# Altium PCB PCB1.PcbDoc
Units mm, origin at the board's own origin, x right, y up, seen from the top; angles counter-clockwise.
Board outline 100.42 x 70.25 mm, 2 copper layers (Top Layer, Bottom Layer); 28 components, 68 nets, 182 pads, 14 vias.
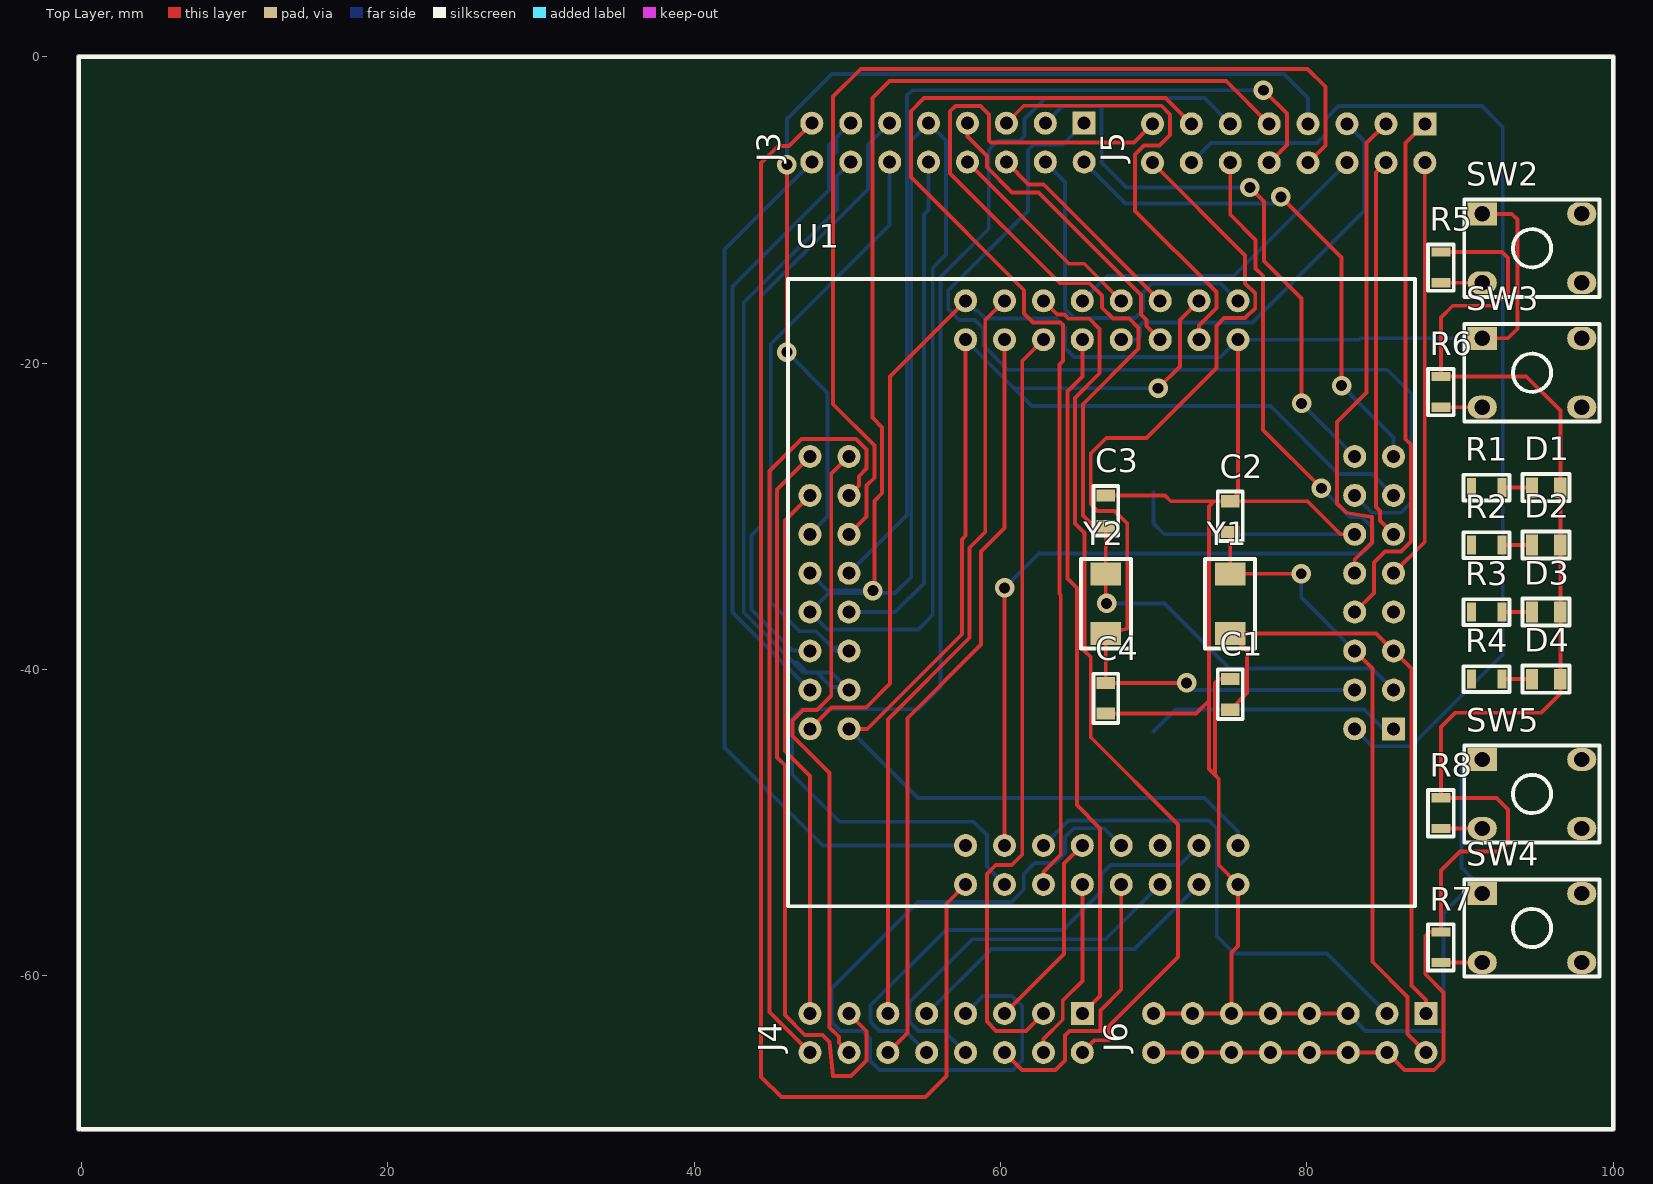
[diagram p0: Top Layer view]
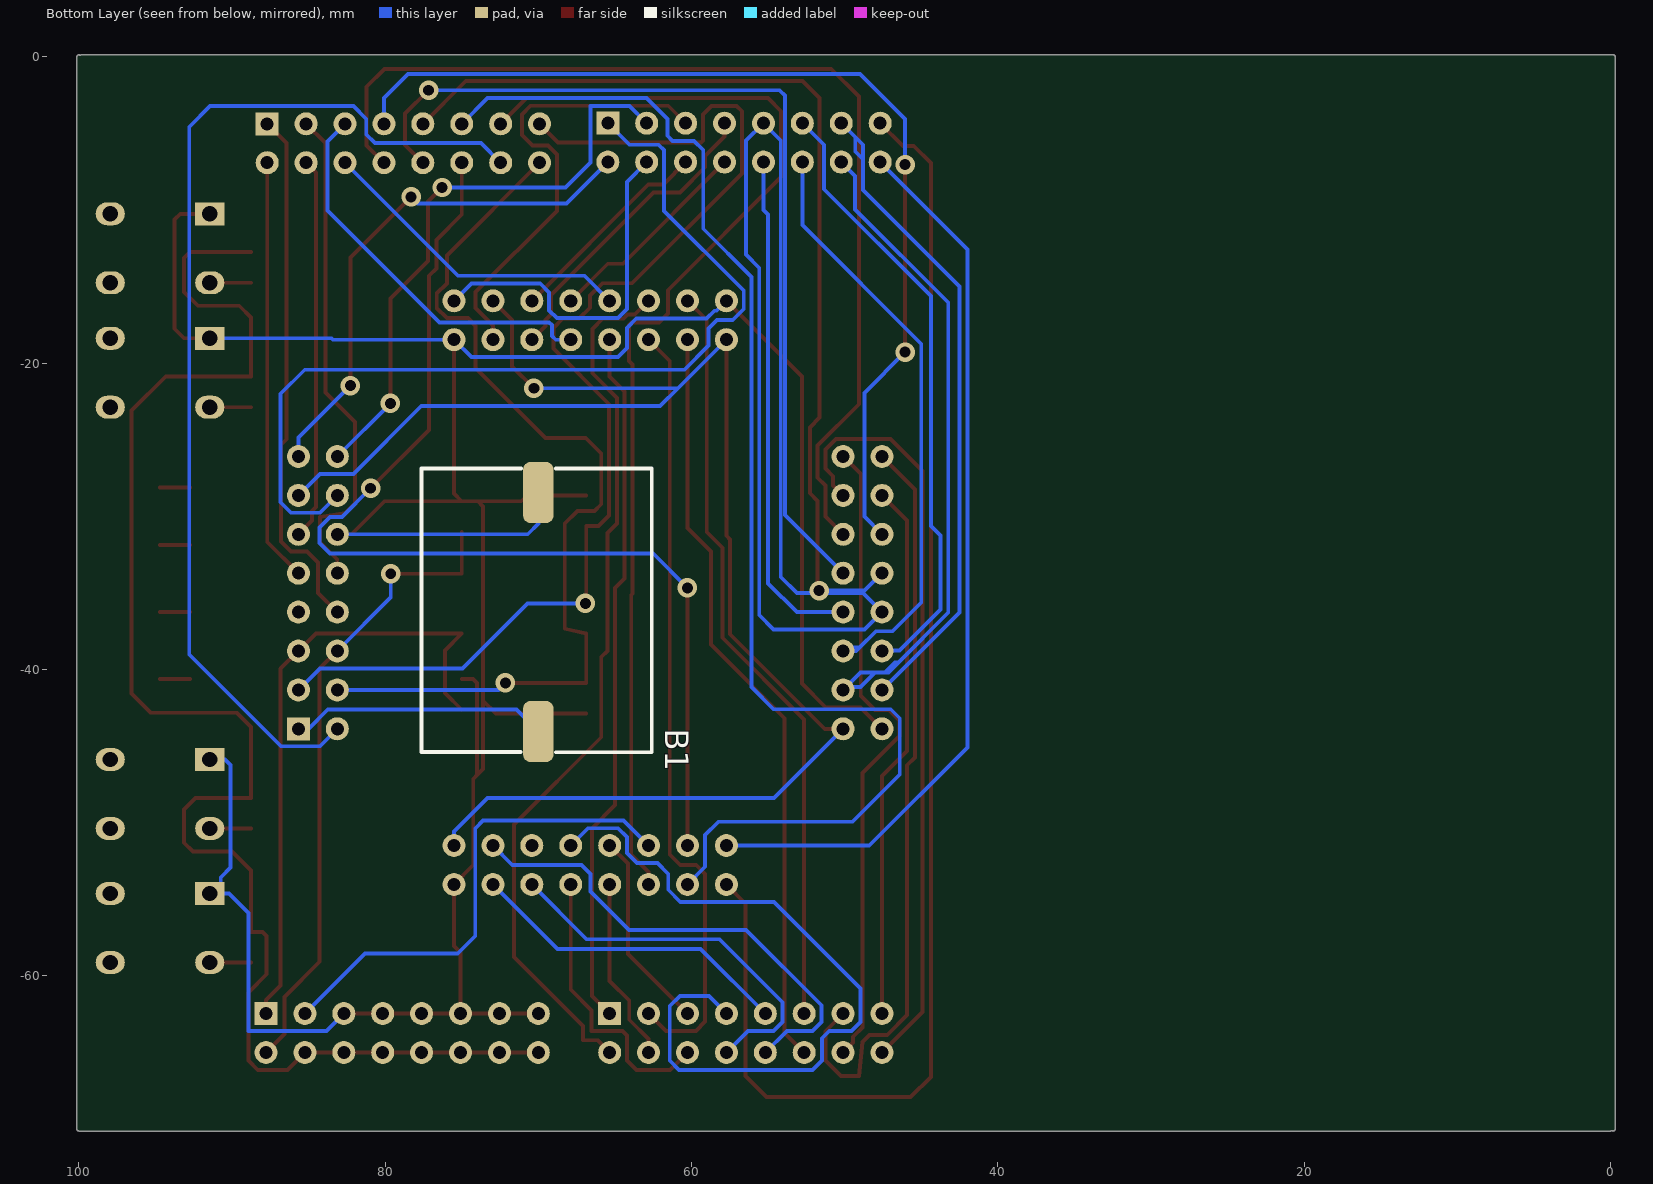
[diagram p1: Bottom Layer view, seen from below]

## Layer stack, top to bottom
Top Solder: solder mask 0.0102, Solder Resist, Dk 3.5
Top Layer: signal copper 0.0356
Dielectric 1: dielectric 0.32, FR-4, Dk 4.8
Bottom Layer: signal copper 0.0356
Bottom Solder: solder mask 0.0102, Solder Resist, Dk 3.5

## Board outline
-0.296,-70 ccw(c-0.169,-70) -0.084,-70.095 ccw(c0,-70) 0,-70.127 100,-70.127 ccw(c100,-70) 100.127,-70 100.127,-69.999 100.127,0 ccw(c100,0) 99.916,0.095 ccw(c99.831,0) 99.831,0.127 -0.169,0.127 ccw(c-0.169,0) -0.296,0

## Design rules (kind name [scope] priority, off if disabled: settings)
Clearance [All] p1: gap=0.254 ignorepadtopadclearanceinfootprint=FALSE except(0: Arc-Hole Track-Hole SMDPad-Hole THPad-Hole Via-Hole Fill-Hole Poly-Hole Region-Hole Text-Hole)
PolygonConnect [All] p1: connectstyle=Relief reliefconductorwidth=0.254 reliefentries=4 polygonreliefangle="90 Angle" airgapwidth=0.254
RoutingVias [All] p1: holewidth=0.711 width=1.27 viastyle="Through Hole" minholewidth=0.711 minwidth=1.27 maxholewidth=0.711 maxwidth=1.27
SolderMaskExpansion [All] p1: expansion=0.102
Width [All] p1: maxlimit=1 minlimit=0.254 preferedwidth=0.254
30 further rules are at their usual default settings.

## Components (designator, comment, footprint, x,y, rotation, side; value= is the part's Value field where it differs from the comment)
B1 "Batery" CR1220 70,-36.25 r180 bottom
C1 "22pF" C0805 75,-41.625 r90 top
C2 "22pF" C0805 75,-30.015 r90 top
C3 "22pF" C0805 66.875,-29.64 r90 top
C4 "22pF" C0805 66.875,-41.875 r270 top
D1 "LED0805" L0805RED 95.625,-28.125 r270 top
D2 "LED0805" L0805RED 95.625,-31.875 r270 top
D3 "LED0805" L0805RED 95.625,-36.25 r270 top
D4 "LED0805" L0805RED 95.625,-40.625 r270 top
J3 "Header 8x2 TH Pitch 2.54mm" "Header 8x2 TH Pitch 2.54mm" 56.575,-5.605 r270 top
J4 "Header 8x2 TH Pitch 2.54mm" "Header 8x2 TH Pitch 2.54mm" 56.455,-63.73 r270 top
J5 "Header 8x2 TH Pitch 2.54mm" "Header 8x2 TH Pitch 2.54mm" 78.81,-5.645 r270 top
J6 "Header 8x2 TH Pitch 2.54mm" "Header 8x2 TH Pitch 2.54mm" 78.89,-63.73 r270 top
R1 "10k" R0805 91.795,-26.601 r0 top
R2 "10k" R0805 91.795,-30.351 r0 top
R3 "10k" R0805 91.795,-34.726 r0 top
R4 "10k" R0805 91.795,-39.101 r0 top
R5 "10k" R0805 87.226,-13.7 r90 top
R6 "10k" R0805 87.226,-21.825 r90 top
R7 "10k" R0805 87.226,-58.075 r90 top
R8 "10k" R0805 87.226,-49.325 r90 top
SW2 "Button1" BUTTON_HOLE_5.0mm 94.7,-12.5 r90 top
SW3 "Button1" BUTTON_HOLE_5.0mm 94.7,-20.625 r90 top
SW4 "Button1" BUTTON_HOLE_5.0mm 94.7,-56.875 r90 top
SW5 "Button1" BUTTON_HOLE_5.0mm 94.7,-48.125 r90 top
U1 "STM32F103RCT6" "QFP64_0.5 SOCKET PINOUT" 66.615,-34.98 r0 top
Y1 "8MHz" SMD5032 75,-37.65 r270 top
Y2 "8MHz" SMD5032 66.875,-33.75 r90 top

## Footprints (in the part's own frame and the unit in brackets; to place one, negate y for a bottom-side part, rotate by r counter-clockwise, add the part's x,y. Pads: shape width x height; smd on the part's side, far side on the other; paste and mask are expansions set on the pad)
BUTTON_HOLE_5.0mm [mm]
  rect 1.5x1.9 hole 1: 1(2.25,3.25)
  oval 1.5x1.9 hole 1: 2(2.25,-3.25) 3(-2.25,3.25) 4(-2.25,-3.25)
  silkscreen extent -3.17,-4.4 3.18,4.43, body extent -3,-3.86 3,3.86, height 5
C0805 [mm]
  rect 0.8x1.2 smd: 1(-1,0) 2(1,0)
  silkscreen extent -1.6,-0.81 1.63,0.81, body extent -1,-0.62 1,0.63, height 0.58
CR1220 [mm]
  rrect50% 2x4 smd: 1(0,-7.8) 2(0,7.8)
  silkscreen extent -7.62,-9.15 7.4,9.37, body extent -7.62,-9.1 7.37,9.4, height 4.04
"Header 8x2 TH Pitch 2.54mm" [mm]
  rect 1.5x1.5 hole 0.85: 1(-1.27,8.89)
  round 1.5 hole 0.85: 2(1.27,8.89) 3(-1.27,6.35) 4(1.27,6.35) 5(-1.27,3.81) 6(1.27,3.81) 7(-1.27,1.27) 8(1.27,1.27) 9(-1.27,-1.27) 10(1.27,-1.27) 11(-1.27,-3.81) 12(1.27,-3.81) 13(-1.27,-6.35) 14(1.27,-6.35) 15(-1.27,-8.89) 16(1.27,-8.89)
  body extent -2.54,-10.16 2.54,10.16, height 8.89
L0805RED [mm]
  rect 1.35x0.8 smd: 1(0,0.925) 2(0,-0.925)
  silkscreen extent -0.89,-1.55 0.89,1.52, body extent -0.67,-1.05 0.68,1.05, height 0.9
"QFP64_0.5 SOCKET PINOUT" [mm]
  rect 1.5x1.5 hole 0.85: 1(19.05,-8.89)
  round 1.5 hole 0.85: 2(16.51,-8.89) 3(19.05,-6.35) 4(16.51,-6.35) 5(19.05,-3.81) 6(16.51,-3.81) 7(19.05,-1.27) 8(16.51,-1.27) 9(19.05,1.27) 10(16.51,1.27) 11(19.05,3.81) 12(16.51,3.81) 13(19.05,6.35) 14(16.51,6.35) 15(19.05,8.89) 16(16.51,8.89) 17(8.89,19.05) 18(8.89,16.51) 19(6.35,19.05) 20(6.35,16.51) 21(3.81,19.05) 22(3.81,16.51) 23(1.27,19.05) 24(1.27,16.51) 25(-1.27,19.05) 26(-1.27,16.51) 27(-3.81,19.05) 28(-3.81,16.51) 29(-6.35,19.05) 30(-6.35,16.51) 31(-8.89,19.05) 32(-8.89,16.51) 33(-19.05,8.89) 34(-16.51,8.89) 35(-19.05,6.35) 36(-16.51,6.35) 37(-19.05,3.81) 38(-16.51,3.81) 39(-19.05,1.27) 40(-16.51,1.27) 41(-19.05,-1.27) 42(-16.51,-1.27) 43(-19.05,-3.81) 44(-16.51,-3.81) 45(-19.05,-6.35) 46(-16.51,-6.35) 47(-19.05,-8.89) 48(-16.51,-8.89) 49(-8.89,-19.05) 50(-8.89,-16.51) 51(-6.35,-19.05) 52(-6.35,-16.51) 53(-3.81,-19.05) 54(-3.81,-16.51) 55(-1.27,-19.05) 56(-1.27,-16.51) 57(1.27,-19.05) 58(1.27,-16.51) 59(3.81,-19.05) 60(3.81,-16.51) 61(6.35,-19.05) 62(6.35,-16.51) 63(8.89,-19.05) 64(8.89,-16.51)
  silkscreen extent -20.48,-20.48 20.45,20.48, body extent -20.32,-20.32 20.32,20.32, height 9.5
R0805 [mm]
  rect 0.6x1.24 smd: 1(-1.05,-1.524) 2(0.95,-1.524)
  silkscreen extent -1.57,-2.36 1.45,-0.69, body extent -1.05,-2.15 0.95,-0.9, height 0.45
SMD5032 [mm]
  rect 1.5x2 smd: 1(-3.9,0) 2(0,0)
  silkscreen extent -4.87,-1.65 0.97,1.62, body extent -4.45,-1.6 0.55,1.6, height 1.2

## Part data
C1 C2 C3 C4: library part Capacitors(SMD)
R1 R2 R3 R4 R5 R6 R7 R8: library part "Resistor SMD"
U1: "LQFP64"
Y1 Y2: library part Crystal

## Via types
v1: diameter 1.27, hole 0.711, Top Layer to Bottom Layer, 14 vias

## Nets (pads, with @x,y where several pads share a name; then routed paths per layer and width w, separated by ;. In a path a pad name is that pad's centre, name@x,y a point inside that pad or via, vN(x,y) a via of type N, cw(c..) or ccw(c..) an arc to the next point about the centre after c; other vN are vias at no path point)
3.3V: U1.13 U1.19 U1.32 U1.48 U1.64 | length 106.7
  Top Layer w0.254: U1.48 51.306,-43.87 57.477,-37.698 57.477,-31.515 57.725,-31.267 U1.32 ; v1(70.285,-21.639) 71.708,-20.216 71.708,-17.187 U1.19
  Bottom Layer w0.254: U1.48 54.62,-48.385 73.309,-48.385 75.505,-50.581 U1.64 ; U1.32 60.894,-21.639 ; v1(70.285,-21.639) 60.894,-21.639 ; U1.13 84.262,-27.227 82.061,-27.227 77.642,-22.807 62.062,-22.807 60.894,-21.639
GND: B1.2 C1.2 C2.2 C3.2 C4.2 J6.5 J6.7 J6.9 J6.11 J6.13 J6.15 SW2.1 SW3.1 SW4.1 SW5.1 U1.12 U1.18 U1.31 U1.47 U1.63 | length 214.7
  Top Layer w0.254: U1.47 48.968,-42.467 51.235,-42.467 52.785,-40.917 52.785,-20.87 U1.31 ; C4.2 72.773,-42.875 73.613,-42.035 ; C3.2 70.743,-28.64 71.118,-29.015 73.943,-29.015 ; J6.15 J6.13 J6.11 ; C1.2 74.261,-40.625 73.994,-40.892 73.994,-46.886 ; U1.18 75.505,-28.51 C2.2 ; J6.5 J6.7 J6.9 J6.11 ; U1.12 82.188,-31.17 80.033,-29.015 C2.2 ; SW3.1 93.125,-18.375 93.75,-17.75 93.75,-10.625 93.375,-10.25 SW2.1 ; 73.613,-42.035 73.613,-46.505 73.994,-46.886 ; 73.613,-42.035 73.613,-29.345 73.943,-29.015 ; 73.943,-29.015 C2.2 ; 73.994,-46.886 74.248,-47.14 74.248,-52.773 U1.63 75.505,-58.044 75.08,-58.469 J6.11
  Bottom Layer w0.254: U1.31 58.376,-16.581 58.503,-16.581 59.017,-17.095 63.608,-17.095 64.214,-17.702 64.214,-19.016 64.799,-19.601 74.374,-19.601 U1.18 83.417,-18.47 83.512,-18.375 SW3.1 ; B1.2 70,-30.478 70.692,-31.17 U1.12 ; J6.5 83.84,-63.6 88.929,-63.6 88.929,-55.895 90.199,-54.625 SW4.1@90.732,-54.625 ; SW4.1 SW4.1@90.732,-54.625 ; SW5.1 90.448,-45.875 90.097,-46.226 90.097,-52.932 90.732,-53.567 SW4.1@90.732,-54.625
NetB1_1: B1.1 U1.1 | length 16.8
  Bottom Layer w0.254: B1.1 71.431,-42.619 83.747,-42.619 84.998,-43.87 U1.1
NetD1_2: D1.2 R1.2 | length 2
  Top Layer w0.254: R1.2 D1.2
NetD2_2: D2.2 R2.2 | length 2
  Top Layer w0.254: R2.2 D2.2
NetD3_2: D3.2 R3.2 | length 2
  Top Layer w0.254: R3.2 D3.2
NetD4_2: D4.2 R4.2 | length 2
  Top Layer w0.254: R4.2 D4.2
NetJ1_1: R4.1
NetJ1_3: R3.1
NetJ1_5: R2.1
NetJ1_7: R1.1
NetR5_1: R5.1 SW2.3 | length 2.7
  Top Layer w0.254: R5.1 SW2.3
NetR6_1: R6.1 SW3.3 | length 2.7
  Top Layer w0.254: R6.1 SW3.3
NetR7_1: R7.1 SW4.3 | length 2.7
  Top Layer w0.254: R7.1 SW4.3
NetR8_1: R8.1 SW5.3 | length 2.7
  Top Layer w0.254: R8.1 SW5.3
NRST: U1.7
PA0: J3.1 U1.14 | length 61.6
  Bottom Layer w0.254: J3.1 64.061,-5.738 62.15,-5.738 61.794,-6.094 61.794,-10.064 56.594,-15.264 56.594,-16.476 57.312,-17.194 58.347,-17.194 58.881,-17.727 58.881,-18.845 60.463,-20.427 85.253,-20.427 86.821,-21.994 86.821,-29.081 86.135,-29.767 84.262,-29.767 U1.14
PA1: J3.2 U1.15 | length 34.1
  Top Layer w0.254: v1(78.312,-9.142) 82.274,-13.104 v1(82.274,-21.461)
  Bottom Layer w0.254: J3.2 68.16,-9.57 77.884,-9.57 v1(78.312,-9.142) ; v1(82.274,-21.461) 85.665,-24.852 U1.15
PA2: J3.3 U1.16 | length 38.6
  Top Layer w0.254: v1(76.28,-8.532) 77.194,-9.447 77.194,-13.325 79.658,-15.789 v1(79.658,-22.623)
  Bottom Layer w0.254: J3.3 64.056,-3.204 66.596,-3.204 66.596,-6.907 68.222,-8.532 v1(76.28,-8.532) ; v1(79.658,-22.623) U1.16
PA3: J3.4 U1.17 | length 23.8
  Bottom Layer w0.254: J3.4 64.214,-8.164 64.214,-16.476 64.799,-17.061 68.786,-17.061 69.294,-16.553 69.294,-15.384 69.879,-14.799 74.374,-14.799 U1.17
PA4: J3.5 U1.20 | length 30.3
  Top Layer w0.254: J3.5 61.522,-3.198 70.514,-3.198 71.073,-3.757 71.073,-5.098 70.387,-5.784 69.371,-5.784 68.787,-6.368 68.787,-10.056 74.096,-15.366 74.096,-16.4 72.965,-17.531 U1.20
PA5: J3.6 U1.21 | length 13.8
  Top Layer w0.254: J3.6 61.84,-8.33 62.825,-8.33 U1.21
PA6: J3.7 U1.22 | length 20.4
  Top Layer w0.254: J3.7 57.845,-5.212 59.109,-6.476 59.109,-7.212 60.76,-8.863 62.486,-8.863 69.17,-15.547 69.17,-16.831 69.524,-17.185 69.524,-17.569 U1.22
PA7: J3.8 U1.23 | length 13.8
  Top Layer w0.254: J3.8 64.481,-13.511 65.466,-13.511 U1.23
PA8: J3.9 U1.41 | length 79.5
  Bottom Layer w0.254: U1.41 48.702,-37.387 54.639,-37.387 55.578,-36.448 55.578,-13.783 56.442,-12.919 56.442,-5.472 J3.9 54.174,-5.466 54.174,-33.951 53.125,-35 48.815,-35 U1.41
PA9: J3.10 U1.42 | length 33.7
  Bottom Layer w0.254: U1.42 53.125,-36.25 55,-34.375 55,-10.305 ; J3.10 55.305,-10 ; 55,-10.305 55.305,-10 ; 55,-10.305 55.305,-10
PA10: J3.11 U1.43 | length 40.4
  Bottom Layer w0.254: U1.43 47.537,-38.762 46.434,-38.762 43.75,-36.078 43.75,-31.25 44.375,-30.625 44.375,-15.625 51.356,-8.644 51.356,-5.744 J3.11
PA11: J3.12 U1.44 | length 39.6
  Bottom Layer w0.254: J3.12 52.765,-10.985 45,-18.75 45,-35.625 46.875,-37.5 47.97,-37.5 49.022,-38.551 ; 49.022,-38.551 49.26,-38.79 U1.44 49.867,-38.551 49.022,-38.551
PA12: J3.13 U1.45 | length 43.9
  Bottom Layer w0.254: U1.45 42.5,-36.265 42.5,-15 48.816,-8.684 48.816,-6.685 ; J3.13 49.313,-5.247 ; 48.816,-6.685 48.816,-5.744 49.313,-5.247 ; 48.816,-6.685 49.313,-6.188 49.313,-5.247
PA13: J3.14 U1.46 | length 44.7
  Bottom Layer w0.254: U1.46 U1.46@49.915,-41.139 ; J3.14 49.324,-7.776 49.324,-9.957 43.242,-16.04 43.242,-36.288 46.491,-39.537 ; 46.491,-39.537 47.153,-40.199 47.375,-40.199 ; 46.491,-39.537 46.713,-39.537 47.375,-40.199 ; 47.375,-40.199 48.034,-40.199 ; 48.034,-40.199 48.974,-40.199 U1.46@49.915,-41.139 ; 48.034,-40.199 48.974,-41.139 U1.46@49.915,-41.139
PA14: J3.15 U1.49 | length 90.3
  Top Layer w0.254: J3.15 46.193,-5.827 45.495,-5.827 44.377,-6.944 44.377,-66.597 45.698,-67.918 55.096,-67.918 56.468,-66.546 56.468,-55.287 U1.49
PA15: J3.16 U1.50 | length 59
  Bottom Layer w0.254: J3.16 41.99,-12.57 41.99,-45.083 48.397,-51.49 U1.50
PB0: J4.1 U1.26 | length 45.8
  Top Layer w0.254: J4.1 66.501,-61.304 66.501,-50.366 64.986,-48.851 64.986,-34.678 64.367,-34.059 64.367,-21.861 65.345,-20.883 U1.26
PB1: J4.2 U1.27 | length 58.2
  Top Layer w0.254: U1.27 63.706,-16.831 64.173,-16.831 64.444,-17.103 65.801,-17.103 66.476,-17.778 66.476,-20.66 64.875,-22.261 64.875,-30.478 65.494,-31.097 65.494,-38.784 65.891,-39.181 65.891,-44.423 71.581,-50.112 71.581,-58.764 67.083,-63.261 67.083,-64.198 66.147,-64.198 J4.2
PB2: J4.3 U1.28 | length 51.1
  Top Layer w0.254: J4.3 61.665,-63.6 59.719,-63.6 59.109,-62.99 59.109,-53.338 59.694,-52.754 60.735,-52.754 61.421,-52.068 61.421,-19.854 U1.28
PB3: J4.4 U1.55 | length 12
  Top Layer w0.254: J4.4 62.805,-64.123 64.062,-62.865 64.062,-61.618 65.345,-60.336 U1.55
PB4: J4.5 U1.56 | length 13.1
  Top Layer w0.254: J4.5 64.16,-58.565 64.16,-52.675 U1.56
PB5: J4.6 U1.57 | length 18.9
  Top Layer w0.254: J4.6 61.405,-66.14 63.604,-66.14 64.214,-65.53 64.214,-63.879 64.493,-63.6 66.526,-63.6 66.526,-62.253 67.885,-60.895 U1.57
PB6: J4.7 U1.58 | length 50
  Bottom Layer w0.254: J4.7 58.871,-61.314 60.76,-61.314 61.421,-61.974 61.421,-65.53 60.811,-66.14 52.099,-66.14 51.489,-65.53 51.489,-64.074 51.006,-63.591 49.559,-63.591 48.974,-63.006 48.974,-60.821 54.628,-55.167 60.735,-55.167 61.522,-54.379 61.522,-53.338 62.234,-52.627 63.554,-52.627 64.214,-51.967 64.214,-50.944 64.799,-50.359 66.754,-50.359 U1.58
PB7: J4.8 U1.59 | length 25.3
  Bottom Layer w0.254: J4.8 56.316,-63.591 54.639,-63.591 54.054,-63.006 54.054,-61.721 58.17,-57.605 66.85,-57.605 U1.59
PB8: J4.9 U1.61 | length 21.3
  Bottom Layer w0.254: J4.9 59.405,-58.24 68.755,-58.24 U1.61
PB9: J4.10 U1.62 | length 32
  Bottom Layer w0.254: J4.10 53.776,-63.591 52.099,-63.591 51.514,-63.006 51.514,-61.914 56.432,-56.996 64.088,-56.996 66.602,-54.481 66.602,-53.338 67.187,-52.754 71.701,-52.754 U1.62
PB10: J4.11 U1.29 | length 49.7
  Top Layer w0.254: J4.11 52.645,-43.267 57.985,-37.927 57.985,-32.053 59.008,-31.03 59.008,-17.187 U1.29
PB11: J4.12 U1.30 | length 49.7
  Top Layer w0.254: J4.12 53.928,-63.717 53.928,-43.178 58.741,-38.365 58.741,-32.283 60.265,-30.759 U1.30
PB12: J4.13 U1.33 | length 49.6
  Top Layer w0.254: U1.33 45.418,-28.237 45.418,-45.743 45.927,-46.251 45.927,-62.558 47.222,-63.854 48.391,-63.854 48.848,-64.311 49.076,-66.546 50.245,-66.546 51.261,-65.53 51.261,-63.616 J4.13
PB13: J4.14 U1.34 | length 42.5
  Top Layer w0.254: J4.14 49.457,-64.352 49.457,-63.97 48.848,-63.361 48.848,-46.758 46.434,-44.344 46.434,-43.324 47.121,-42.637 48.035,-42.637 48.949,-41.723 48.949,-27.246 U1.34
PB14: J4.15 U1.35 | length 35.2
  Top Layer w0.254: J4.15 47.565,-46.948 45.926,-45.309 45.926,-30.269 U1.35
PB15: J4.16 U1.36 | length 50
  Top Layer w0.254: J4.16 44.91,-62.345 44.91,-27.05 47.019,-24.941 50.575,-24.941 51.261,-25.627 51.261,-26.877 50.753,-27.385 50.753,-27.982 U1.36
PC0: J5.1 U1.8 | length 34.7
  Top Layer w0.254: U1.8 84.382,-34.993 84.382,-33.018 85.094,-32.307 86.135,-32.307 86.796,-31.646 86.796,-25.322 86.44,-24.966 86.44,-5.635 J5.1
PC1: J5.2 U1.9 | length 27.6
  Top Layer w0.254: U1.9 87.7,-31.675 J5.2
PC2: J5.3 U1.10 | length 32.8
  Top Layer w0.254: U1.10 83.125,-32.828 84.256,-31.697 84.256,-30.046 82.579,-29.767 81.969,-29.157 81.969,-23.849 83.9,-21.918 83.9,-5.635 J5.3
PC3: J5.4 U1.11 | length 25
  Top Layer w0.254: J5.4 84.509,-7.566 84.509,-29.392 84.764,-29.647 84.764,-30.269 U1.11
PC4: J5.5 U1.24 | length 25.9
  Bottom Layer w0.254: U1.24 68.863,-18.47 69.117,-18.216 69.117,-17.517 69.295,-17.339 76.465,-17.339 83.773,-10.031 83.773,-5.528 J5.5
PC5: J5.6 U1.25 | length 21
  Bottom Layer w0.254: U1.25 66.984,-14.291 75.244,-14.291 J5.6
PC6: J5.7 U1.37 | length 66.3
  Top Layer w0.254: v1(46.054,-19.277) v1(46.054,-7.034)
  Bottom Layer w0.254: v1(46.054,-19.277) 48.714,-21.937 48.714,-30.021 U1.37 ; v1(46.054,-7.034) 46.054,-4.062 49,-1.116 78.515,-1.116 80.08,-2.681 J5.7
PC7: J5.8 U1.38 | length 69.2
  Top Layer w0.254: U1.38 51.261,-30.014 51.261,-27.989 51.769,-27.481 51.769,-25.373 49.076,-22.68 49.076,-2.589 50.88,-0.785 80.039,-0.785 81.211,-1.957 81.211,-5.784 J5.8
PC8: J5.9 U1.39 | length 64.8
  Top Layer w0.254: v1(51.667,-34.847) 51.769,-34.745 51.769,-28.998 52.277,-28.49 52.277,-24.196 51.634,-23.553 51.634,-2.696 52.757,-1.573 74.738,-1.573 J5.9
  Bottom Layer w0.254: U1.39 48.702,-34.847 v1(51.667,-34.847)
PC9: J5.10 U1.40 | length 62
  Top Layer w0.254: v1(77.169,-2.182) 78.693,-3.706 78.693,-5.762 J5.10
  Bottom Layer w0.254: U1.40 53.902,-29.913 53.902,-2.538 54.258,-2.182 v1(77.169,-2.182)
PC10: J5.11 U1.51 | length 87.1
  Bottom Layer w0.254: U1.51 59.109,-52.874 59.109,-50.798 58.246,-49.934 49.483,-49.934 46.409,-46.861 46.409,-43.178 46.994,-42.594 54.639,-42.594 56.086,-41.147 56.086,-14.375 59.236,-11.225 59.236,-6.094 59.846,-5.484 61.243,-5.484 61.573,-5.154 61.573,-4.062 62.945,-2.69 73.315,-2.69 J5.11
PC11: J5.12 U1.52 | length 71.2
  Top Layer w0.254: U1.52 v1(60.265,-34.669) ; J5.12 75,-10.301 76.661,-11.961 76.661,-13.808 77.144,-14.291 77.144,-24.357 v1(80.953,-28.167)
  Bottom Layer w0.254: v1(60.265,-34.669) 62.5,-32.434 83.595,-32.434 84.281,-31.748 84.281,-30.725 83.595,-30.039 82.826,-30.039 v1(80.953,-28.167)
PC12: J5.13 U1.53 | length 75.6
  Top Layer w0.254: U1.53 62.805,-53.211 63.936,-52.08 63.936,-35.127 63.859,-35.05 63.859,-20.089 64.088,-19.861 64.088,-17.491 63.935,-17.339 62.125,-17.339 61.548,-16.762 61.548,-15.238 54.156,-7.847 54.156,-3.554 55.02,-2.69 70.775,-2.69 J5.13
PC13: J5.14 U1.2 | length 70.1
  Bottom Layer w0.254: J5.14 73.738,-5.637 80.674,-5.637 81.233,-5.078 81.233,-4.062 82.071,-3.224 91.444,-3.224 92.79,-4.57 92.79,-39.012 86.795,-45.007 84.262,-45.007 U1.2
PC14: C3.1 J5.15 U1.3 Y2.2 | length 78.5
  Top Layer w0.254: v1(66.933,-35.685) 66.875,-35.627 Y2.2 C3.1 66.069,-30.64 65.383,-29.954 65.383,-22.68 69.016,-19.047 69.016,-17.703 68.406,-17.092 67.339,-17.092 66.628,-16.381 66.628,-15.594 65.815,-14.781 63.877,-14.781 56.714,-7.618 56.714,-3.554 57.064,-3.204 58.703,-3.204 59.254,-3.755 59.254,-5.459 59.381,-5.586 68.709,-5.586 J5.15
  Bottom Layer w0.254: v1(66.933,-35.685) 70.717,-35.685 74.959,-39.927 84.262,-39.927 U1.3
PC15: C4.1 J5.16 U1.4 Y2.1 | length 62.7
  Top Layer w0.254: J5.16 75.975,-12.97 75.975,-14.799 76.636,-15.46 76.636,-16.4 75.975,-17.061 74.604,-17.061 74.096,-17.569 74.096,-20.318 69.524,-24.89 66.907,-24.89 65.891,-25.906 65.891,-29.208 66.323,-29.64 67.441,-29.64 68.279,-30.478 68.279,-37.336 Y2.1 C4.1 v1(72.148,-40.875)
  Bottom Layer w0.254: v1(72.148,-40.875) 72.603,-41.33 U1.4
PD0: C1.1 J6.1 U1.5 Y1.2 | length 41.6
  Top Layer w0.254: C1.1 76.102,-41.523 76.102,-38.752 Y1.2 84.525,-37.65 U1.5 86.821,-39.946 86.821,-60.628 87.78,-61.587 J6.1
PD1: C2.1 J6.2 U1.6 Y1.1 | length 42
  Top Layer w0.254: C2.1 Y1.1 v1(79.639,-33.75) ; U1.6 84.281,-39.946 84.281,-59.078 86.569,-61.367 86.569,-63.789 J6.2
  Bottom Layer w0.254: v1(79.639,-33.75) 79.639,-35.304 U1.6
PD2: J6.3 U1.54 | length 32.5
  Bottom Layer w0.254: U1.54 64.444,-49.851 73.605,-49.851 74.121,-50.366 74.121,-57.402 75.264,-58.545 81.325,-58.545 J6.3
VCC: D1.1 D2.1 D3.1 D4.1 J6.4 J6.6 J6.8 J6.10 J6.12 J6.14 J6.16 R5.2 R6.2 R7.2 R8.2 | length 101.6
  Top Layer w0.254: J6.16 J6.14 J6.12 J6.10 J6.8 J6.6 J6.4 86.38,-66.14 88.319,-66.14 88.929,-65.53 88.929,-61.085 87.735,-59.891 87.735,-57.402 88.012,-57.125 R7.2 88.75,-53.125 90,-51.875 92.556,-51.875 93.125,-51.306 93.125,-49.13 92.37,-48.375 R8.2 88.75,-43.75 89.675,-42.825 95.279,-42.825 96.55,-41.554 D4.1 D3.1 D2.1 D1.1 96.55,-23.1 94.325,-20.875 R6.2 88.75,-17.024 89.524,-16.25 92.231,-16.25 93.125,-15.356 93.125,-13.125 92.75,-12.75 R5.2
pads on no net: SW2.2 SW2.4 SW3.2 SW3.4 SW4.2 SW4.4 SW5.2 SW5.4 U1.60

## Silkscreen, mask and mechanical layers (free items; w line width, h text height)
Top Overlay:
  lines w0.254: -0.169,-70 -0.169,0 99.831,0 ; 0,-70 100,-70 100,0